# EAGLE board HC-SR04 v1 (EAGLE 9.7.0)
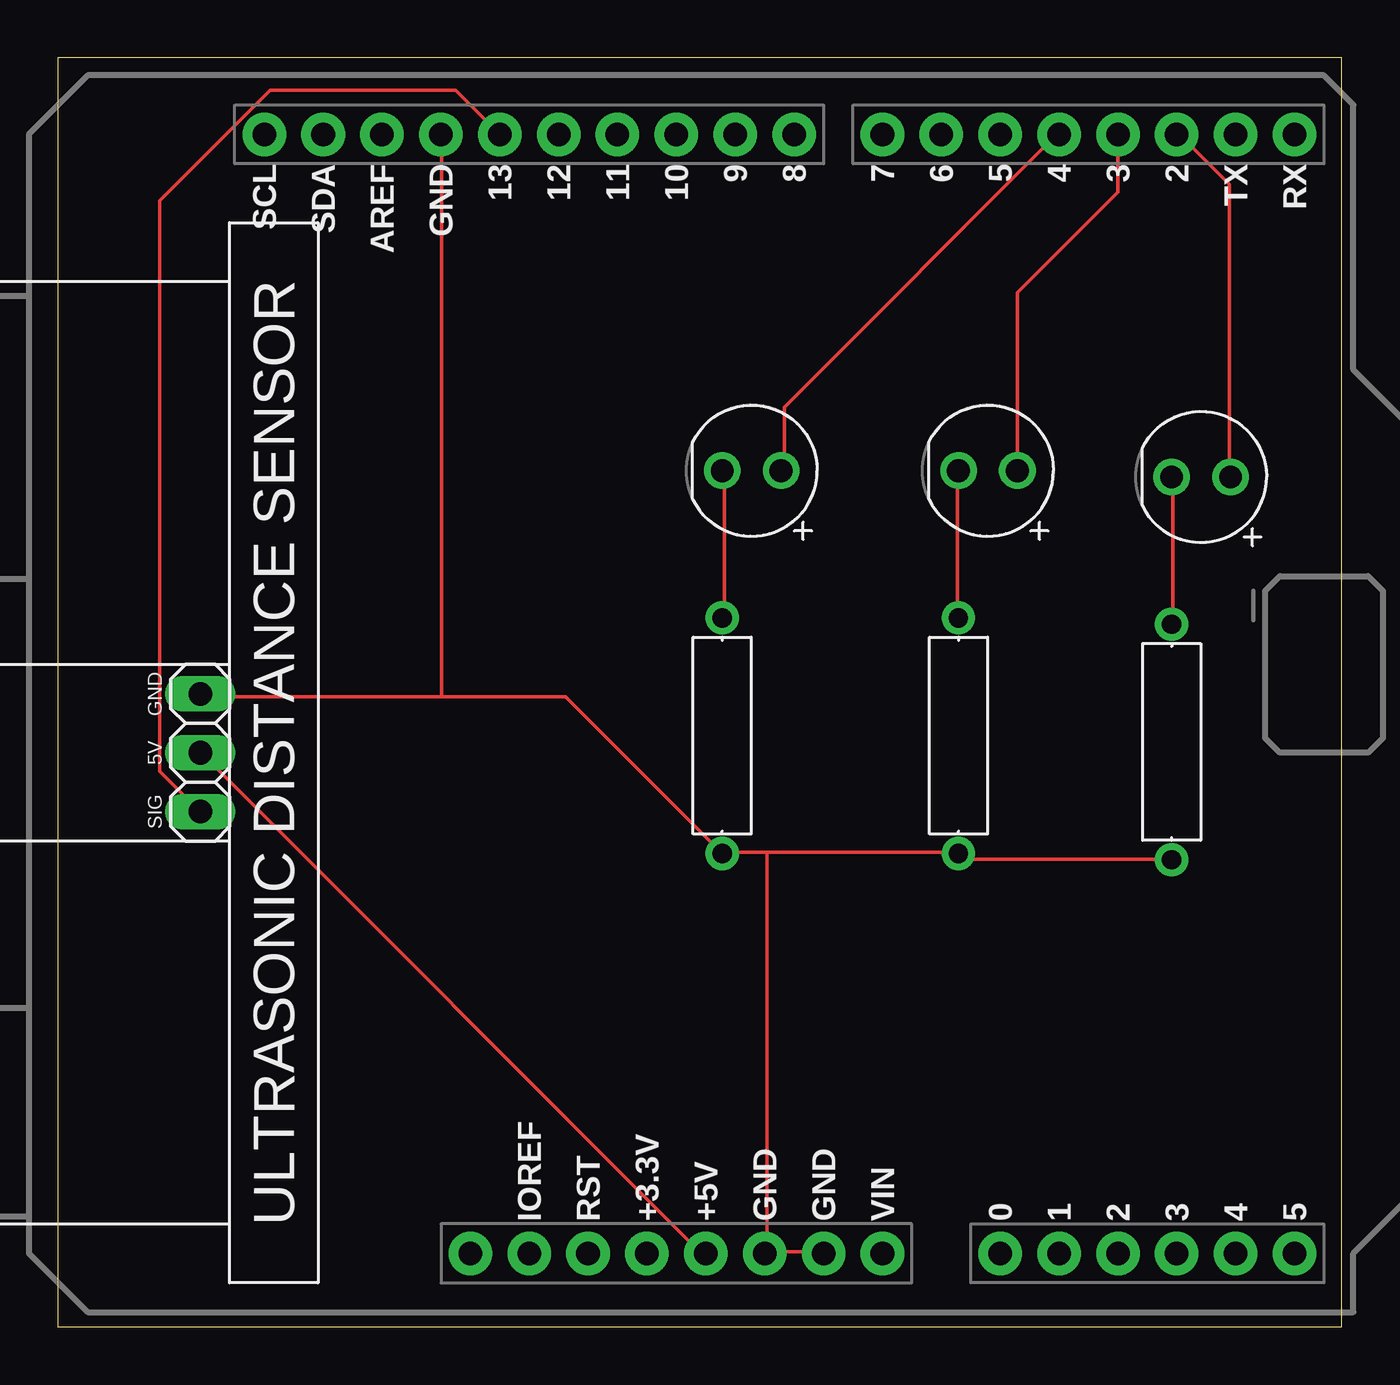
[diagram p0: board, top side]
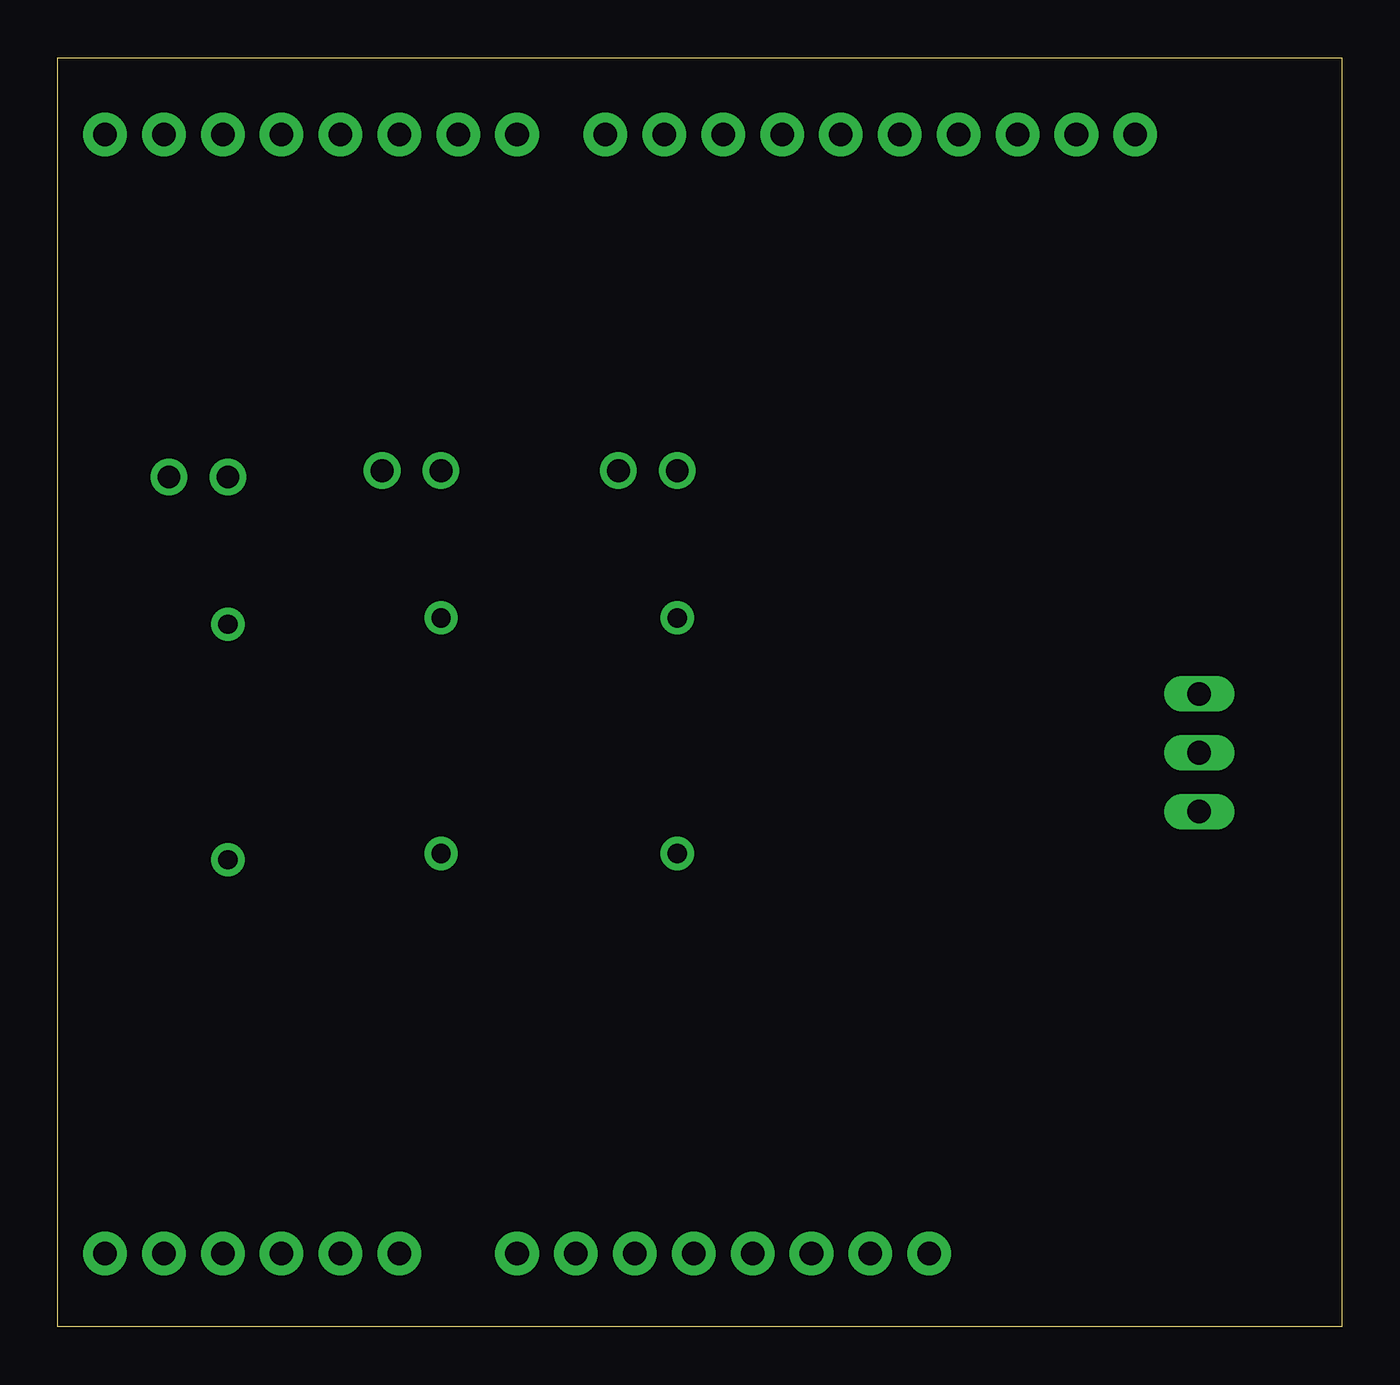
[diagram p1: board, bottom side, seen from below]

Size 55.38 x 54.73 mm. Coordinates in mm from the lower left corner, seen from the top.
Outline: 0,0 55.38,0 55.38,54.73 0,54.73 0,0
Copper layers (1*16): Top 0.035mm / dielectric 1.5mm / Bottom 0.035mm
Design rules "default": minimum track width 6mil, minimum drill 0.35mm, track to track 6mil, track to pad 6mil, pad to pad 6mil, via to via 6mil, smd to smd 6mil, copper to edge 40mil, drill to drill 6mil, minimum pad ring 10mil, minimum via ring 8mil, stop-mask expansion 4mil, vias tented up to drill 0mil, thermal gap 10mil

## Footprints (pad centres in the part's own frame; a part is rotated, then mirrored left to right if it is on the bottom)
LEDRD254W60D565H860B = drill 0.981 pad 1.581: 1 -1.27,0; 2 1.27,0
28015 = drill 1.016 long: 1 -2.54,0; 2 0,0; 3 2.54,0
RESAD1016W63L850D250B = drill 0.83 pad 1.43: 1 -5.08,0; 2 5.08,0
ARDUINO-UNO-R3-SHIELD = drill 1.016 pad 1.88: 3.3V 24.13,-2.54; 5V 24.13,0; A0 24.13,12.7; A1 24.13,15.24; A2 24.13,17.78; A3 24.13,20.32; A4 24.13,22.86; A5 24.13,25.4; AREF -24.13,-13.97; D2 -24.13,20.32; D3 -24.13,17.78; D4 -24.13,15.24; D5 -24.13,12.7; D6 -24.13,10.16; D7 -24.13,7.62; D8 -24.13,3.81; D9 -24.13,1.27; D10 -24.13,-1.27; D11 -24.13,-3.81; D12 -24.13,-6.35; D13 -24.13,-8.89; GND@0 24.13,2.54; GND@1 24.13,5.08; GND@2 -24.13,-11.43; IOREF 24.13,-7.62; NC 24.13,-10.16; RES 24.13,-5.08; RX -24.13,25.4; SCL -24.13,-19.05; SDA -24.13,-16.51; TX -24.13,22.86; VIN 24.13,7.62

## Placement (x,y rotation side)
D1  RED  [LEDRD254W60D565H860B]  29.93,36.93 180 top
D2  RED  [LEDRD254W60D565H860B]  40.12,36.93 180 top
D3  RED  [LEDRD254W60D565H860B]  49.32,36.66 180 top
PING1  DISTANCE-SENSOR-3PIN  [28015]  6.14,24.77 270 top
R1  1k  [RESAD1016W63L850D250B]  28.66,25.5 90 top
R2  1k  [RESAD1016W63L850D250B]  38.85,25.5 90 top
R3  1k  [RESAD1016W63L850D250B]  48.05,25.23 90 top
U1  ARDUINO-UNO-R3-SHIELD  [ARDUINO-UNO-R3-SHIELD]  27.95,27.3 270 top

## Library data of the parts
D1-D3 = Tinkercad; CATEGORY: Opto-Electronic; SUB-CATEGORY: LED; VALUE: LED_RED
PING1 R1-R3 U1 = Tinkercad

## Nets
D1_C: D1.2 R1.2
D2_C: D2.2 R2.2
D3_C: D3.2 R3.2
U1_5V: PING1.2 U1.5V
U1_D2: D3.1 U1.D2
U1_D3: D2.1 U1.D3
U1_D4: D1.1 U1.D4
U1_D13: PING1.3 U1.D13
U1_GND: PING1.1 R1.1 R2.1 R3.1 U1.GND@0 U1.GND@1 U1.GND@2

## Tracks (layer width: path | path; a pad name or v marks a point on that pad's centre or on a via)
D1_C
  Top 0.152: R1.2 28.75,30.68 28.75,36.78 D1.2
D2_C
  Top 0.152: R2.2 38.81,30.68 38.81,36.78 D2.2
D3_C
  Top 0.152: R3.2 48.11,30.38 48.11,36.63 D3.2
U1_5V
  Top 0.152: PING1.2 6.2,24.74 27.84,3.1 U1.5V
U1_D2
  Top 0.152: D3.1 50.55,36.78 50.55,49.28 48.41,51.41 U1.D2
U1_D3
  Top 0.152: U1.D3 45.73,48.93 41.4,44.6 41.4,36.93 D2.1
U1_D4
  Top 0.152: D1.1 31.34,36.93 31.34,39.68 43.08,51.41 U1.D4
U1_D13
  Top 0.152: U1.D13 17.16,53.34 9.15,53.34 4.39,48.57 4.39,23.98 PING1.3
  Bottom 0.152: 6.2,22.3 PING1.3
U1_GND
  Top 0.152: 30.58,3.25 33.02,3.25 U1.GND@1 | 30.58,20.47 38.81,20.47 R2.1 38.96,20.32 39.12,20.17 47.95,20.17 R3.1 | 30.58,20.47 28.75,20.47 R1.1 28.6,20.47 21.89,27.18 16.56,27.18 | 16.56,27.18 6.2,27.18 PING1.1 | 16.56,27.18 16.56,51.41 U1.GND@2 | 30.58,20.47 30.58,3.25 | 30.58,3.25 U1.GND@0